# Altium PCB Artemis_Plus.PcbDoc (part 1 of 2)
Units mm, origin at the board's own origin, x right, y up, seen from the top; angles counter-clockwise.
Board outline 15.5 x 10.5 mm, 4 copper layers (L1(Top), L2, L3, L4(Bot)), stack 0.828 mm thick; 85 components, 68 nets, 213 pads, 150 vias.
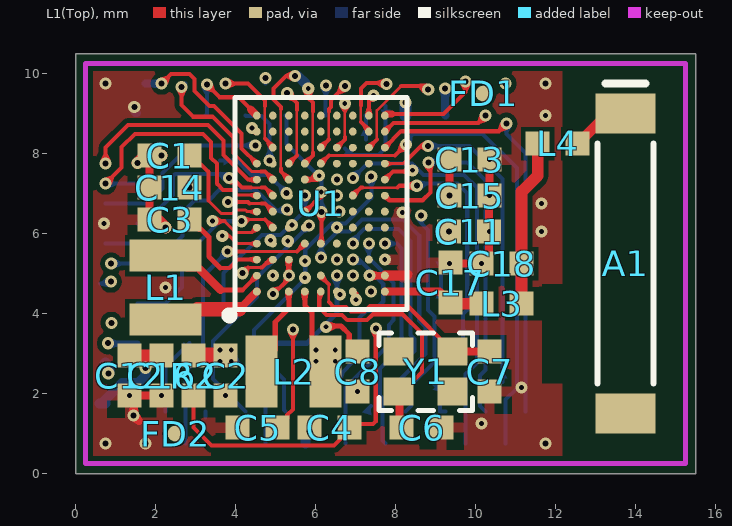
[diagram p0: L1(Top) view]
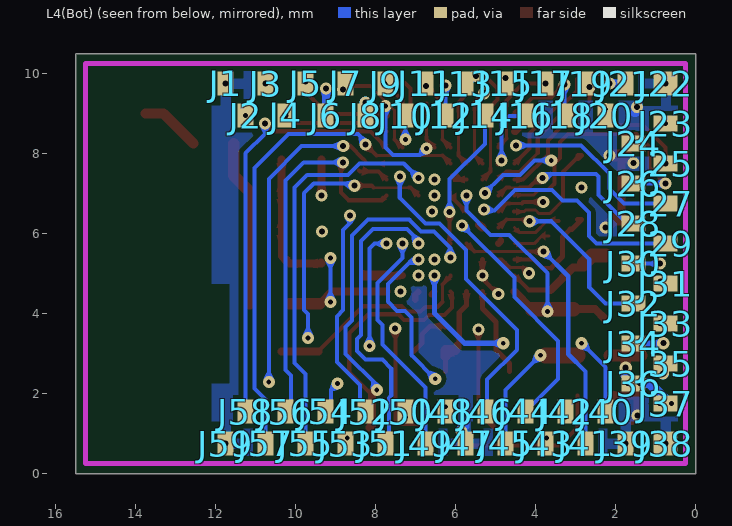
[diagram p1: L4(Bot) view, seen from below]
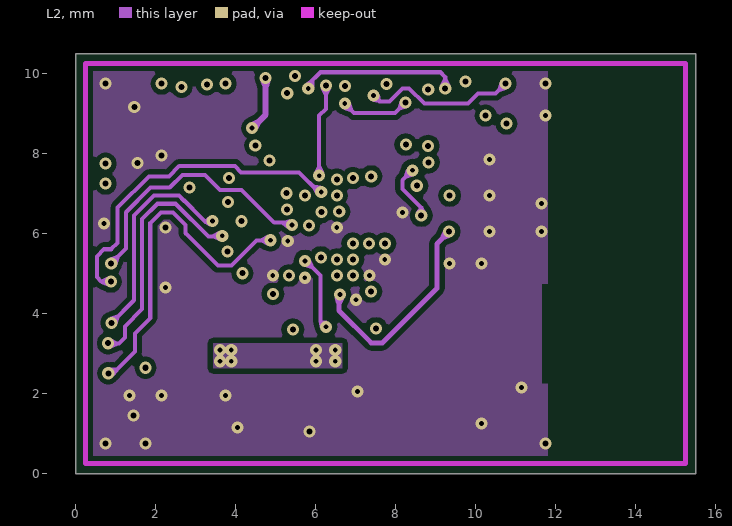
[diagram p2: L2]
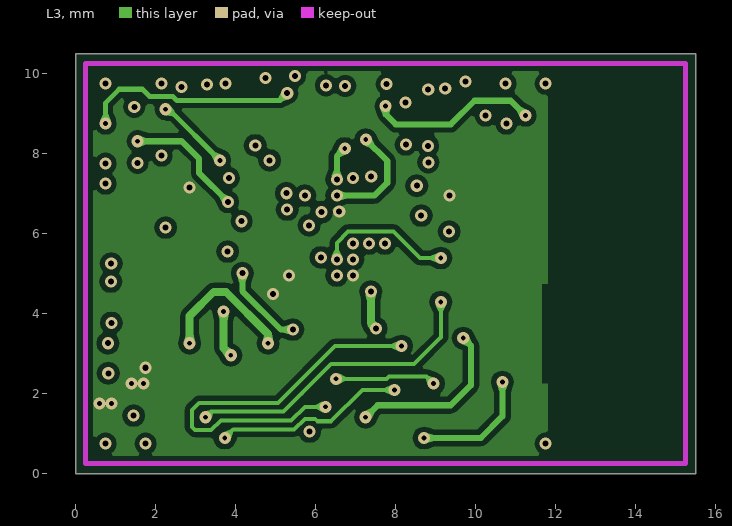
[diagram p3: L3]
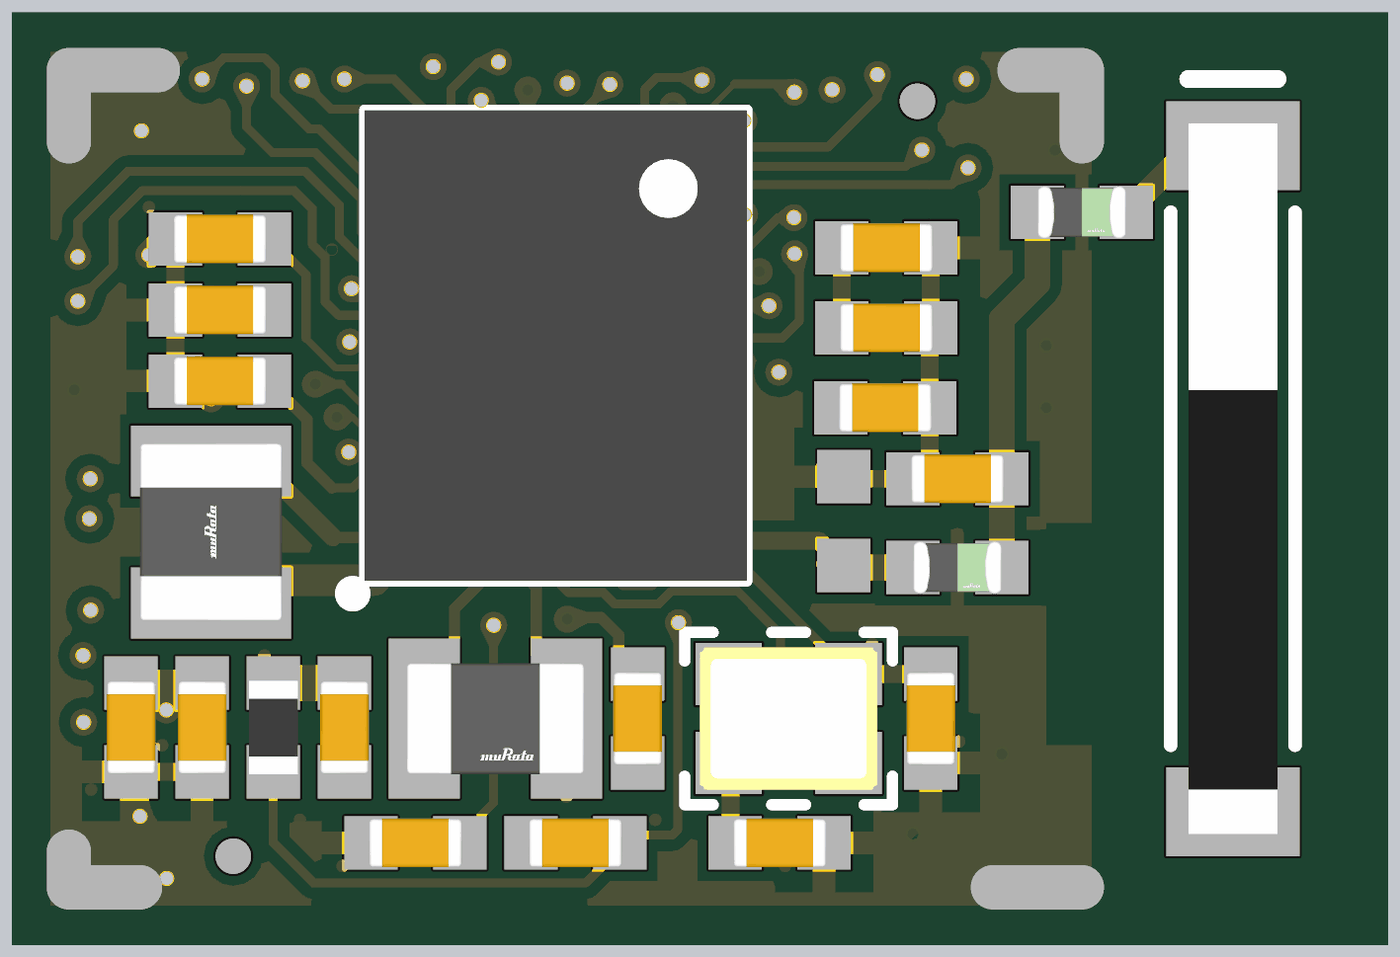
[diagram p4: 3D render of the assembled board from above, using the file's embedded part models]

## Layer stack, top to bottom
Top Solder: solder mask 0.02, Solder Resist, Dk 4.2
L1(Top): signal copper 0.04
Dielectric 1: prepreg 0.074, FR-4, Dk 3.63
L2: signal copper 0.015
Dielectric3: core 0.57, FR-4, Dk 4.24
L3: signal copper 0.015
Dielectric2: dielectric 0.074, FR-4, Dk 3.63
L4(Bot): signal copper 0.04
Bottom Solder: solder mask 0.02, Solder Resist, Dk 4.2

## Board outline
0,10.5 15.5,10.5 15.5,0 0,0

## Design rules (kind name [scope] priority, off if disabled: settings)
BoardOutlineClearance mdCopperDimension [All] p1: gap=0.375 ignorepadtopadclearanceinfootprint=FALSE
Clearance Clearance_for_PolygonClass_Isolate_5 [InPolygonClass('Isolate_5') vs IsArc Or IsTrack Or IsPad Or IsVia Or IsFill Or IsRegion Or IsText] p1: gap=0.127 ignorepadtopadclearanceinfootprint=FALSE
Clearance Clearance_UnderBGA [InNetClass('Under_BGA_Signals') vs OnLayer('L1(Top)')] p2: gap=0.076 ignorepadtopadclearanceinfootprint=FALSE except(0: SMDPad-Via; 0.069: Arc-Arc Arc-Track Arc-SMDPad Track-Track Track-SMDPad SMDPad-SMDPad) // rules for under the BGA
Clearance [All] p3: gap=0.076 ignorepadtopadclearanceinfootprint=FALSE except(0: SMDPad-Via)
HoleSize HoleSize_For_NetClass_3.3V [InNetClass('3.3V')] p1: absolutevalues=TRUE maxlimit=0 minlimit=0 maxpercent=80.000 minpercent=20.000
HoleSize HoleSize_For_NetClass_power [InNetClass('power')] p2: absolutevalues=TRUE maxlimit=0 minlimit=0 maxpercent=80.000 minpercent=20.000
HoleSize [All] p3: absolutevalues=TRUE maxlimit=2540 minlimit=0.12 maxpercent=80.000 minpercent=20.000
HoleToHoleClearance mdDrill [All] p1: gap=0.102 allowstackedmicrovias=TRUE
MinimumSolderMaskSliver [All] p1 off: minsoldermaskwidth=0.254
PasteMaskExpansion Expansion_SMDPaste_OFF [InPadClass('SMDPaste_OFF')] p1: expansion=0
PasteMaskExpansion mlMinCreamFrame [All] p2: expansion=0
PolygonConnect PolygonConnect_For_PolygonThermal_ON_Width40000_Gap100000 [InPolygonClass('PolygonThermal_ON_Width40000_Gap100000') vs Not IsVia] p1: connectstyle=Relief reliefconductorwidth=0.254 reliefentries=4 polygonreliefangle="90 Angle" airgapwidth=0.254
PolygonConnect PolygonConnect_For_PolygonThermal_ON_Width59100_Gap100000 [InPolygonClass('PolygonThermal_ON_Width59100_Gap100000') vs Not IsVia] p2: connectstyle=Relief reliefconductorwidth=0.15 reliefentries=4 polygonreliefangle="90 Angle" airgapwidth=0.254
PolygonConnect ThermalVias [IsVia] p3: connectstyle=Direct reliefconductorwidth=0.254 reliefentries=4 polygonreliefangle="90 Angle" airgapwidth=0.254
PolygonConnect [All] p4: connectstyle=Relief reliefconductorwidth=0.254 reliefentries=4 polygonreliefangle="90 Angle" airgapwidth=0.254
RoutingVias [All] p1: holewidth=0.15 width=0.303 viastyle="Through Hole" minholewidth=0.15 minwidth=0.303 maxholewidth=2.54 maxwidth=2.54
SilkToSolderMaskClearance [IsPad] p1: minsilkscreentomaskgap=0.051 clearancetoexposedcopper=TRUE
SolderMaskExpansion "Apollo3 Plus SM expansion" [InComponent('U1')] p1: expansion=0.038 istentingtop=FALSE
SolderMaskExpansion "Via Tenting" [IsVia] p2: expansion=0.025 istentingtop=TRUE
SolderMaskExpansion "Module Pads mask expansion" [InPadClass('SMDSolder_OFF')] p3: expansion=0 istentingtop=FALSE
SolderMaskExpansion [All] p4: expansion=0.025 istentingtop=FALSE
UnRoutedNet [All] p1: checkbadconnections=TRUE
Width "Width_Under BGA_Signals" [InNetClass('Under_BGA_Signals')] p1: maxlimit=0.5 minlimit=0.069 preferedwidth=0.102 midlayer1_minwidth=0.102 midlayer2_minwidth=0.102 bottomlayer_minwidth=0.102 minimp=50.000000 maximp=50.000000 favimp=50.000000
Width Width_For_NetClass_3.3V [InNetClass('3.3V')] p2: maxlimit=1.016 minlimit=0.254 preferedwidth=0.508
Width Width_For_NetClass_power [InNetClass('power')] p3: maxlimit=0.254 minlimit=0.178 preferedwidth=0.178
Width [All] p4: maxlimit=0.5 minlimit=0.076 preferedwidth=0.102 midlayer1_minwidth=0.102 midlayer2_minwidth=0.102 bottomlayer_minwidth=0.102 minimp=50.000000 maximp=50.000000 favimp=50.000000
24 further rules are at their usual default settings.

## Classes and differential pairs
net class Under_BGA_Signals: BOOTLOAD D7 D8 D9 D10 NetC5_1 NetC7_2 R\S\T\ TXO-0 ~AD11 ~AD13 ~AD32 ~D6 ~D18 ~D22 ~D27 ~D37
polygon class PolygonThermal_ON_Width40000_Gap100000: Polygon_1_Net_GND Polygon_1_Net_VDD Polygon_2_Net_GND Polygon_3_Net_GND
polygon class PolygonThermal_ON_Width59100_Gap100000: Polygon_1_Net_VDDBH
polygon class Isolate_5: Polygon_1_Net_GND Polygon_1_Net_VDD Polygon_2_Net_GND Polygon_3_Net_GND
pad class SMDSolder_OFF: U1-A1 U1-A2 U1-A3 U1-A4 U1-A5 U1-A6 U1-A7 U1-A8 U1-A9 U1-A10 U1-A11 U1-A12 U1-B1 U1-B2 U1-B3 U1-B4 U1-B5 U1-B6 U1-B7 U1-B8 U1-B9 U1-B10 U1-B11 U1-B12 U1-C1 U1-C2 U1-C3 U1-C4 U1-C5 U1-C6 U1-C7 U1-C8 U1-C9 U1-C10 U1-C11 U1-C12 U1-D1 U1-D2 U1-D3 U1-D4 U1-D5 U1-D6 U1-D7 U1-D8 U1-D9 U1-D10 U1-D11 U1-D12 U1-E1 U1-E2 U1-E3 U1-E4 U1-E9 U1-E10 U1-E11 U1-E12 U1-F1 U1-F2 U1-F3 U1-F4 U1-F5 U1-F6 U1-F7 U1-F8 U1-F9 U1-F10 U1-F11 U1-F12 U1-G1 U1-G2 U1-G3 U1-G4 U1-G5 U1-G6 U1-G7 U1-G8 U1-G9 U1-G10 U1-G11 U1-G12 U1-H1 U1-H2 U1-H3 U1-H4 U1-H5 U1-H6 U1-H7 U1-H8 U1-H9 U1-H10 U1-H11 U1-H12 U1-J1 U1-J2 U1-J3 U1-J4 U1-J5 U1-J6 U1-J7 U1-J8 U1-J9 U1-J10 U1-J11 U1-J12

## Components (designator, comment, footprint, x,y, rotation, side; value= is the part's Value field where it differs from the comment)
A1 "RGFRA8010110A2T" RGFRA8010110A2T 13.75,5.25 r270 top
C1 "0.47uF" 0402-TIGHT-C 2.35,7.95 r180 top value=470nF
C2 "4.7uF" 0402-TIGHT-C 3.75,2.45 r270 top
C3 "2.2uF" 0402-TIGHT-C 2.35,6.35 r180 top
C4 "1.0uF" 0402-TIGHT-C 6.35,1.15 r180 top value=1uF
C5 "2.2uF" 0402-TIGHT-C 4.55,1.15 r180 top
C6 "6pF" 0402-TIGHT-C 8.65,1.15 r180 top
C7 "6pF" 0402-TIGHT-C 10.35,2.55 r90 top
C8 "2.2uF" 0402-TIGHT-C 7.05,2.55 r270 top
C11 "47nF" 0402-TIGHT-C 9.838,6.049 r0 top
C12 "1.0uF" 0402-TIGHT-C 1.35,2.45 r270 top value=1uF
C13 "1.0uF" 0402-TIGHT-C 9.85,7.85 r0 top value=1uF
C14 "1.0uF" 0402-TIGHT-C 2.35,7.15 r180 top value=1uF
C15 "1.0uF" 0402-TIGHT-C 9.85,6.95 r0 top value=1uF
C16 "2.2uF" 0402-TIGHT-C 2.15,2.45 r270 top
C17 "DNP" 0402-TIGHT 9.371,4.773 r90 top
C18 "0.5pF" 0402-TIGHT-C 10.65,5.25 r180 top
FD1 "FIDUCIAL0.4MM" FIDUCIAL-0.4MM#1 11.49,10.64 r0 top
FD2 "FIDUCIAL0.4MM" FIDUCIAL-0.4MM#2 2.5,1 r0 top
J1 "PAD.4X.6" MODULE_PAD 11.75,9.75 r270 bottom
J2 "PAD.4X.6" MODULE_PAD 11.25,8.95 r270 bottom
J3 "PAD.4X.6" MODULE_PAD 10.75,9.75 r90 bottom
J4 "PAD.4X.6" MODULE_PAD 10.25,8.95 r270 bottom
J5 "PAD.4X.6" MODULE_PAD 9.75,9.75 r270 bottom
J6 "PAD.4X.6" MODULE_PAD 9.25,8.95 r270 bottom
J7 "PAD.4X.6" MODULE_PAD 8.75,9.75 r270 bottom
J8 "PAD.4X.6" MODULE_PAD 8.25,8.95 r270 bottom
J9 "PAD.4X.6" MODULE_PAD 7.75,9.75 r90 bottom
J10 "PAD.4X.6" MODULE_PAD 7.25,8.95 r90 bottom
J11 "PAD.4X.6" MODULE_PAD 6.75,9.75 r270 bottom
J12 "PAD.4X.6" MODULE_PAD 6.25,8.95 r270 bottom
J13 "PAD.4X.6" MODULE_PAD 5.75,9.75 r270 bottom
J14 "PAD.4X.6" MODULE_PAD 5.25,8.95 r90 bottom
J15 "PAD.4X.6" MODULE_PAD 4.75,9.75 r270 bottom
J16 "PAD.4X.6" MODULE_PAD 4.25,8.95 r90 bottom
J17 "PAD.4X.6" MODULE_PAD 3.75,9.75 r270 bottom
J18 "PAD.4X.6" MODULE_PAD 3.25,8.95 r90 bottom
J19 "PAD.4X.6" MODULE_PAD 2.75,9.75 r90 bottom
J20 "PAD.4X.6" MODULE_PAD 2.25,8.95 r90 bottom
J21 "PAD.4X.6" MODULE_PAD 1.75,9.75 r90 bottom
J22 "" MODULE_MINI_PAD 0.75,9.75 r90 bottom
J23 "PAD.4X.6" MODULE_PAD 0.75,8.75 r0 bottom
J24 "PAD.4X.6" MODULE_PAD 1.55,8.25 r180 bottom
J25 "PAD.4X.6" MODULE_PAD 0.75,7.75 r180 bottom
J26 "PAD.4X.6" MODULE_PAD 1.55,7.25 r0 bottom
J27 "PAD.4X.6" MODULE_PAD 0.75,6.75 r180 bottom
J28 "PAD.4X.6" MODULE_PAD 1.55,6.25 r0 bottom
J29 "PAD.4X.6" MODULE_PAD 0.75,5.75 r180 bottom
J30 "PAD.4X.6" MODULE_PAD 1.55,5.25 r0 bottom
J31 "PAD.4X.6" MODULE_PAD 0.75,4.75 r0 bottom
J32 "PAD.4X.6" MODULE_PAD 1.55,4.25 r180 bottom
J33 "PAD.4X.6" MODULE_PAD 0.75,3.75 r0 bottom
J34 "PAD.4X.6" MODULE_PAD 1.55,3.25 r180 bottom
J35 "PAD.4X.6" MODULE_PAD 0.75,2.75 r180 bottom
J36 "PAD.4X.6" MODULE_PAD 1.55,2.25 r0 bottom
J37 "PAD.4X.6" MODULE_PAD 0.75,1.75 r180 bottom
J38 "PAD.6X.6" MODULE_MINI_PAD 0.75,0.75 r180 bottom
J39 "PAD.4X.6" MODULE_PAD 1.75,0.75 r90 bottom
J40 "PAD.4X.6" MODULE_PAD 2.25,1.55 r270 bottom
J41 "PAD.4X.6" MODULE_PAD 2.75,0.75 r270 bottom
J42 "PAD.4X.6" MODULE_PAD 3.25,1.55 r270 bottom
J43 "PAD.4X.6" MODULE_PAD 3.75,0.75 r270 bottom
J44 "PAD.4X.6" MODULE_PAD 4.25,1.55 r90 bottom
J45 "PAD.4X.6" MODULE_PAD 4.75,0.75 r270 bottom
J46 "PAD.4X.6" MODULE_PAD 5.25,1.55 r270 bottom
J47 "PAD.4X.6" MODULE_PAD 5.75,0.75 r270 bottom
J48 "PAD.4X.6" MODULE_PAD 6.25,1.55 r270 bottom
J49 "PAD.4X.6" MODULE_PAD 6.75,0.75 r270 bottom
J50 "PAD.4X.6" MODULE_PAD 7.25,1.55 r90 bottom
J51 "PAD.4X.6" MODULE_PAD 7.75,0.75 r270 bottom
J52 "PAD.4X.6" MODULE_PAD 8.25,1.55 r90 bottom
J53 "PAD.4X.6" MODULE_PAD 8.75,0.75 r90 bottom
J54 "PAD.4X.6" MODULE_PAD 9.25,1.55 r270 bottom
J55 "PAD.4X.6" MODULE_PAD 9.75,0.75 r90 bottom
J56 "PAD.4X.6" MODULE_PAD 10.25,1.55 r270 bottom
J57 "PAD.4X.6" MODULE_PAD 10.75,0.75 r270 bottom
J58 "PAD.4X.6" MODULE_PAD 11.25,1.55 r270 bottom
J59 "PAD.4X.6" MODULE_PAD 11.75,0.75 r270 bottom
L1 "2.2μH" DFE201610E-2R2MP2 2.25,4.65 r90 top
L2 "1.0uH" LQM21PN1R0MEHD 5.45,2.55 r0 top value=1uH
L3 "2.7nH 900mA 70 mOhm" 0402-TIGHT-L 10.65,4.25 r0 top value=2.7nH
L4 "2nH 900mA 120mOhm" 0402-TIGHT-L 12.05,8.25 r0 top value=2nH
R2 "0" 0402-TIGHT-R 2.95,2.45 r270 top value=0R
U1 "AMBIQ-APOLLO3-BLUE-PLUS" "BGA-104-5.3X4.3MM - Sprite-mixed-0.2-0.19 - 3DModel" 6.13,6.75 r90 top
Y1 "32MHz" ECS-320-6-37B2-CKM-TR 8.75,2.55 r180 top

## Footprints (in the part's own frame and the unit in brackets; to place one, negate y for a bottom-side part, rotate by r counter-clockwise, add the part's x,y. Pads: shape width x height; smd on the part's side, far side on the other; paste and mask are expansions set on the pad)
0402-TIGHT [mm] "0402-TIGHT"
  rect 0.6x0.6 smd: 1(-0.5,0) 2(0.5,0)
0402-TIGHT-C [mm] "0402-TIGHT Capacitor"
  rect 0.6x0.6 smd: 1(-0.5,0) 2(0.5,0)
  body extent -0.53,-0.28 0.53,0.28, height 0.6
0402-TIGHT-L [mm] "0402-TIGHT Inductor"
  rect 0.6x0.6 smd: 1(-0.5,0) 2(0.5,0)
  body extent -1.04,-0.59 1.04,0.59, height 0.25
0402-TIGHT-R [mm] "0402-TIGHT-Resistor model"
  rect 0.6x0.6 smd: 1(-0.5,0) 2(0.5,0)
  body extent -0.53,-0.28 0.53,0.28, height 0.4
"BGA-104-5.3X4.3MM - Sprite-mixed-0.2-0.19 - 3DModel" [mm] "BGA-104-5.3X4.3MM"
  rrect100% 0.2x0.2 smd mask+0.038: A1(-2.2,1.6) A10(1.4,1.6) B1(-2.2,1.2) B2(-1.8,1.2) B5(-0.6,1.2) B6(-0.2,1.2) B7(0.2,1.2) B8(0.6,1.2) C1(-2.2,0.8) C2(-1.8,0.8) C5(-0.6,0.8) C6(-0.2,0.8) C7(0.2,0.8) C8(0.6,0.8) D1(-2.2,0.4) D2(-1.8,0.4) D3(-1.4,0.4) D4(-1,0.4) D5(-0.6,0.4) D6(-0.2,0.4) D7(0.2,0.4) D8(0.6,0.4) D9(1,0.4) E2(-1.8,0) E3(-1.4,0) E4(-1,0) E9(1,0) F2(-1.8,-0.4) F3(-1.4,-0.4) F4(-1,-0.4) F5(-0.6,-0.4) F6(-0.2,-0.4) F7(0.2,-0.4) F8(0.6,-0.4) G1(-2.2,-0.8) G2(-1.8,-0.8) G3(-1.4,-0.8) G4(-1,-0.8) G5(-0.6,-0.8) G6(-0.2,-0.8) G7(0.2,-0.8) G8(0.6,-0.8) H1(-2.2,-1.2) H2(-1.8,-1.2) H3(-1.4,-1.2) H4(-1,-1.2) H5(-0.6,-1.2) H6(-0.2,-1.2) J1(-2.2,-1.6) J2(-1.8,-1.6) J3(-1.4,-1.6) J4(-1,-1.6) J5(-0.6,-1.6) J6(-0.2,-1.6)
  rrect100% 0.19x0.2 smd mask+0.038: A2(-1.8,1.6) A3(-1.4,1.6) A4(-1,1.6) A5(-0.6,1.6) A6(-0.2,1.6) A7(0.2,1.6) A8(0.6,1.6) A9(1,1.6) B3(-1.4,1.2) B4(-1,1.2) C3(-1.4,0.8) C4(-1,0.8) F9(1,-0.4) F10(1.4,-0.4) G9(1,-0.8) G10(1.4,-0.8) H7(0.2,-1.2) H8(0.6,-1.2) H9(1,-1.2) H10(1.4,-1.2) J7(0.2,-1.6) J8(0.6,-1.6) J9(1,-1.6) J10(1.4,-1.6)
  rrect100% 0.2x0.19 smd mask+0.038: A11(1.8,1.6) A12(2.2,1.6) B9(1,1.2) B10(1.4,1.2) B11(1.8,1.2) B12(2.2,1.2) C9(1,0.8) C10(1.4,0.8) C11(1.8,0.8) C12(2.2,0.8) D10(1.4,0.4) D11(1.8,0.4) D12(2.2,0.4) E1(-2.2,0) E10(1.4,0) E11(1.8,0) E12(2.2,0) F1(-2.2,-0.4) F11(1.8,-0.4) F12(2.2,-0.4) G11(1.8,-0.8) G12(2.2,-0.8) H11(1.8,-1.2) H12(2.2,-1.2) J11(1.8,-1.6) J12(2.2,-1.6)
  silkscreen extent -2.89,-2.15 2.65,2.39, body extent -2.65,-2.15 2.65,2.15, height 0.8
DFE201610E-2R2MP2 [mil] "DFE201610E-2R2MP2 footprint"
  rect 31.5x70.87 smd: 1(-31.5,0) 2(31.5,0)
  body extent -85,-57 85,57, height 10
ECS-320-6-37B2-CKM-TR [mm] "ECS-320-6-37B2-CKM-TR Footprint"
  rect 0.75x0.7 smd: 1(-0.675,-0.5) 2(0.675,-0.5) 3(0.675,0.5) 4(-0.675,0.5)
  silkscreen extent -1.17,-0.97 1.17,0.97, body extent -1,-0.8 1,0.8, height 0.5
FIDUCIAL-0.4MM#1 [mm] "FIDUCIAL-0.4MM"
  rrect100% 0.4x0.4 smd paste+0 mask+0.025: 1(-1.29,-1.14)
FIDUCIAL-0.4MM#2 [mm] "FIDUCIAL-0.4MM"
  rrect100% 0.4x0.4 smd paste+0 mask+0.025: 1(0,0)
LQM21PN1R0MEHD [mil] "0805-WIDE"
  rect 31.5x70.87 smd: 1(-31.5,0) 2(31.5,0)
  body extent -84,-49 84,49, height 10
MODULE_MINI_PAD [mm] "MODULE_MINI_PAD"
  rect 0.6x0.6 smd paste-0.6 mask+0.025: 1(0,0)
MODULE_PAD [mm] "MODULE_PAD"
  rect 0.6x0.4 smd paste-0.4 mask+0.025: 1(0,0)
RGFRA8010110A2T [mm] "RGFRA8010110A2T Footprint with 3D Model"
  rect 1x1.5 smd: FEED(-3.75,0) NC(3.75,0)
  silkscreen extent -4.5,-0.7 3,0.7, body extent -4,-0.5 4,0.5, height 1.11

## Part data
A1: "Chip Antenna, 2.45Ghz, Smt Rohs Compliant: Yes", Manufacturer="Walsin Technologies", Supplier Part Number 1=1292-RGFRA8010110A2TCT-ND, Category="RF Antennas", Manufacturer Part Number=RGFRA8010110A2T, Pricing 1="1=0.36, 10=0.293, 25=0.2684, 100=0.1997, 250=0.181, 500=0.1498, 1000=0.11235 (USD)", RoHS=No, Stock 1=5842, Supplier 1=Digi-Key
C1: library part CC0402KRX7R6BB474, "Multilayer Ceramic Capacitor, 0.47 uF, 50 V, ± 2%, C0G (NP0), 0402 [1005 Metric]", Case/Package=0402, Dielectric=X7R, Manufacturer=Yageo, Max Operating Temperature=125°C, Min Operating Temperature=-55°C, Supplier Part Number 1=13-CC0402KRX7R6BB474CT-ND, Temperature Coefficient=30ppm/°C, Tolerance=10%, Voltage Rating=10V, Category="Ceramic Capacitors", ComponentLink1Description=http://www.yageo.com/documents/recent/UPY-GPHC_X7R_6.3V-to-50V_18.pdf?src-supplier=Digi-Key, ComponentLink1URL=http://www.yageo.com/documents/recent/UPY-GPHC_X7R_6.3V-to-50V_18.pdf?src-supplier=Digi-Key, ComponentLink2Description=https://datasheet.octopart.com/CC0402KRX7R6BB474-Yageo-datasheet-151948686.pdf?src-supplier=Farnell, ComponentLink2URL=https://datasheet.octopart.com/CC0402KRX7R6BB474-Yageo-datasheet-151948686.pdf?src-supplier=Farnell, ComponentLink3Description=https://datasheet.octopart.com/CC0402KRX7R6BB474-Yageo-datasheet-166511530.pdf?src-supplier=Future+Electronics, ComponentLink3URL=https://datasheet.octopart.com/CC0402KRX7R6BB474-Yageo-datasheet-166511530.pdf?src-supplier=Future+Electronics, Halogen Free="Halogen Free", Height=550um, Lead Free="Lead Free", Length=0.039inch, Manufacturer Part Number=CC0402KRX7R6BB474, Material=4241ConductorMaterial, Mounting Technology="Surface Mount", Packaging="Tape and Reel", Pricing 1="10=0.17, 50=0.1022, 100=0.0864, 500=0.05908, 1000=0.05227, 2500=0.05, 5000=0.04545 (USD)", RoHS=Yes, RoHS Compliant=Yes, Series=CC, Stock 1=3340, Supplier 1=Digi-Key, Thickness=0.022inch, Voltage Rating (DC)=10V, Width=0.02inch
C2: library part CL05A475MP5NRNC, "Multilayer Ceramic Capacitor, 4.7 uF, 10 V, ± 20%, X5R, 0402 [1005 Metric]", Case Code (Imperial)=0402, Case Code (Metric)=1005, Dielectric=X5R, Manufacturer=Samsung, Max Operating Temperature=85°C, Min Operating Temperature=-55°C, Supplier Part Number 1=1276-1482-1-ND, Tolerance=20%, Voltage Rating=10V, Case/Package=0402, Category="Ceramic Capacitors", ComponentLink1Description=https://datasheet.ciiva.com/25786/cl05a475mp5nrnc-25786963.pdf?src-supplier=Digi-Key, ComponentLink1URL=https://datasheet.ciiva.com/25786/cl05a475mp5nrnc-25786963.pdf?src-supplier=Digi-Key, ComponentLink2Description=https://datasheet.ciiva.com/16437/cl05b104kq5nnnc-16437353.pdf?src-supplier=Future+Electronics, ComponentLink2URL=https://datasheet.ciiva.com/16437/cl05b104kq5nnnc-16437353.pdf?src-supplier=Future+Electronics, Height=550um, Lead Free="Lead Free", Manufacturer Part Number=CL05A475MP5NRNC, Material=4241ConductorMaterial, Mounting Technology="Surface Mount", Packaging="Cut Tape", Pricing 1="1=0.1, 10=0.068, 50=0.0368, 100=0.0301, 500=0.0215, 1000=0.01689, 2500=0.01535, 5000=0.01412 (USD)", RoHS=Yes, RoHS Compliant=Yes, Series=CL, Stock 1=3126621, Supplier 1=Digi-Key
C3 C5 C8 C16: library part GRM155R61A225KE01D, "Multilayer Ceramic Capacitor, 2.2 uF, 10 V, ± 10%, X5R, 0402 [1005 Metric]", Manufacturer=Murata, Supplier Part Number 1=490-GRM155R61A225KE01DCT-ND, Category="Ceramic Capacitors", ComponentLink1Description=https://datasheet.octopart.com/GRM155R61A225KE01D-Murata-datasheet-165579666.pdf?src-supplier=TME, ComponentLink1URL=https://datasheet.octopart.com/GRM155R61A225KE01D-Murata-datasheet-165579666.pdf?src-supplier=TME, Manufacturer Part Number=GRM155R61A225KE01D, Pricing 1="1=0.1, 10=0.046, 50=0.0252, 100=0.0205, 500=0.01466, 1000=0.01151, 2500=0.01046, 5000=0.00963 (USD)", RoHS=Yes, Stock 1=9438, Supplier 1=Digi-Key
C4 C12 C13 C14 C15: library part GRM155R70J105KA12J, "Multilayer Ceramic Capacitor, 1 uF, 6.3 V, ± 10%, X7R, 0402 [1005 Metric]", Case Code (Imperial)=0402, Case Code (Metric)=1005, Dielectric=X7R, Manufacturer=Murata, Max Operating Temperature=125°C, Min Operating Temperature=-55°C, Package Quantity=50000, Supplier Part Number 1=490-13339-1-ND, Tolerance=10%, Voltage Rating=6.3V, Case/Package=0402, Category="Ceramic Capacitors", ComponentLink1Description=http://www.mouser.com/ds/2/281/c02e-2905.pdf?src-supplier=Mouser, ComponentLink1URL=http://www.mouser.com/ds/2/281/c02e-2905.pdf?src-supplier=Mouser, ComponentLink2Description=https://datasheet.octopart.com/GRM155R70J105KA12J-Murata-datasheet-32479577.pdf?src-supplier=Future+Electronics, ComponentLink2URL=https://datasheet.octopart.com/GRM155R70J105KA12J-Murata-datasheet-32479577.pdf?src-supplier=Future+Electronics, ComponentLink3Description=https://datasheet.octopart.com/GRM155R70J105KA12J-Murata-datasheet-155345054.pdf?src-supplier=Element14, ComponentLink3URL=https://datasheet.octopart.com/GRM155R70J105KA12J-Murata-datasheet-155345054.pdf?src-supplier=Element14, ComponentLink4Description=http://search.murata.co.jp/Ceramy/image/img/A01X/G101/ENG/GRM155R70J105KA12-01.pdf?src-supplier=Digi-Key, ComponentLink4URL=http://search.murata.co.jp/Ceramy/image/img/A01X/G101/ENG/GRM155R70J105KA12-01.pdf?src-supplier=Digi-Key, ComponentLink5Description=https://datasheet.octopart.com/GRM155R70J105KA12J-Murata-datasheet-165579666.pdf?src-supplier=TME, ComponentLink5URL=https://datasheet.octopart.com/GRM155R70J105KA12J-Murata-datasheet-165579666.pdf?src-supplier=TME, Length=0.039inch, Manufacturer Part Number=GRM155R70J105KA12J, Mounting Technology="Surface Mount", Packaging="Tape and Reel", Pins=2NUMBER, Pricing 1="1=0.1, 10=0.033, 50=0.0178, 100=0.0145, 500=0.01036, 1000=0.00813, 2500=0.00739, 5000=0.0068 (USD)", RoHS=Yes, RoHS Compliant=Yes, Series=GRM, Stock 1=4901077, Supplier 1=Digi-Key, Termination=SMD/SMT, Thickness=0.022inch, Voltage Rating (DC)=6.3V, Weight=0.000212oz, Width=0.02inch
C6 C7: library part 0402N6R0D500CT, "0402 6 pF 50 V ±0.5 pF Tolerance C0G/NP0 SMT Multilayer Ceramic Capacitor", Case Code (Imperial)=0402, Case Code (Metric)=1005, Dielectric=C0G, Manufacturer="Walsin Technologies", Max Operating Temperature=125°C, Min Operating Temperature=-55°C, Supplier Part Number 1=1292-1348-1-ND, Voltage Rating=50V, Case/Package=0402, Category="Ceramic Capacitors", ComponentLink1Description=http://www.farnell.com/datasheets/2340522.pdf?src-supplier=Farnell, ComponentLink1URL=http://www.farnell.com/datasheets/2340522.pdf?src-supplier=Farnell, ComponentLink2Description=http://www.farnell.com/datasheets/1958513.pdf?src-supplier=Farnell, ComponentLink2URL=http://www.farnell.com/datasheets/1958513.pdf?src-supplier=Farnell, ComponentLink3Description=http://www.passivecomponent.com/wp-content/uploads/2018/10/MLCC.pdf?src-supplier=Digi-Key, ComponentLink3URL=http://www.passivecomponent.com/wp-content/uploads/2018/10/MLCC.pdf?src-supplier=Digi-Key, ComponentLink4Description=https://datasheet.octopart.com/0402N6R0D500CT-Walsin-Technologies-datasheet-85392065.pdf?src-supplier=Element14, ComponentLink4URL=https://datasheet.octopart.com/0402N6R0D500CT-Walsin-Technologies-datasheet-85392065.pdf?src-supplier=Element14, ComponentLink5Description=https://datasheet.octopart.com/0402N6R0D500CT-Walsin-Technologies-datasheet-136037192.pdf?src-supplier=TECHDesign, ComponentLink5URL=https://datasheet.octopart.com/0402N6R0D500CT-Walsin-Technologies-datasheet-136037192.pdf?src-supplier=TECHDesign, Lead Free=5697LeadFree, Manufacturer Part Number=0402N6R0D500CT, Packaging="Tape and Reel", Pricing 1="1=0.1, 10=0.024, 50=0.0134, 100=0.0109, 500=0.00778, 1000=0.00611, 2500=0.00556, 5000=0.00511 (USD)", Reach SVHC Compliant=Unknown, RoHS=Yes, RoHS Compliant=Yes, Stock 1=55050, Supplier 1=Digi-Key, Voltage Rating (DC)=50V
C11: library part GCM155R71C473KA37D, "CAP CER 0.047UF 16V 10% X7R 0402", Case Code (Imperial)=0402, Case Code (Metric)=1005, Dielectric=X7R, Manufacturer=Murata, Max Operating Temperature=125°C, Min Operating Temperature=-55°C, Package Quantity=1, Ratings=AEC-Q200, Supplier Part Number 1=490-6042-1-ND, Tolerance=10%, Voltage Rating=16V, Case/Package=0402, Category="Ceramic Capacitors", ComponentLink1Description=https://datasheet.ciiva.com/11607/product-11607786.pdf?src-supplier=Avnet, ComponentLink1URL=https://datasheet.ciiva.com/11607/product-11607786.pdf?src-supplier=Avnet, ComponentLink2Description=https://datasheet.ciiva.com/6270/s0717e-6270764.pdf?src-supplier=Digi-Key, ComponentLink2URL=https://datasheet.ciiva.com/6270/s0717e-6270764.pdf?src-supplier=Digi-Key, ComponentLink3Description=https://datasheet.ciiva.com/6270/s0717e-6270765.pdf?src-supplier=Digi-Key, ComponentLink3URL=https://datasheet.ciiva.com/6270/s0717e-6270765.pdf?src-supplier=Digi-Key, ComponentLink4Description=https://datasheet.ciiva.com/6270/s0717e-6270766.pdf?src-supplier=Digi-Key, ComponentLink4URL=https://datasheet.ciiva.com/6270/s0717e-6270766.pdf?src-supplier=Digi-Key, Construction=Flat, Depth=0.5mm, Height=0.5mm, Length=1mm, Manufacturer Part Number=GCM155R71C473KA37D, Mounting Technology="Surface Mount", Packaging="Tape and Reel", Pricing 1="1=0.1, 10=0.048, 50=0.0262, 100=0.0214, 500=0.01528, 1000=0.01201, 2500=0.01092, 5000=0.01005 (USD)", Radiation Hardening=No, RoHS=Yes, RoHS Compliant=Yes, Series=GCM, Stock 1=635782, Supplier 1=Digi-Key, Termination=SMD/SMT, Thickness=0.022inch, Voltage Rating (DC)=16V, Width=0.02inch
C17: library part DNP-CAP-0402-TIGHT
C18: library part GJM1555C1HR50CB01D, "Multilayer Ceramic Capacitor, 0.5 pF, 50 V, ± 0.25pF, C0G (NP0), 0402 [1005 Metric]", Case Code (Imperial)=0402, Case Code (Metric)=1005, Dielectric=C0G, Manufacturer=Murata, Max Operating Temperature=125°C, Min Operating Temperature=-55°C, Package Quantity=1, Supplier Part Number 1=490-3081-1-ND, Voltage Rating=50V, Case/Package=0402, Category="Ceramic Capacitors", ComponentLink1Description=https://datasheet.ciiva.com/129/chip20monolithic20cer20caps20c02e-13-129648.pdf?src-supplier=Digi-Key, ComponentLink1URL=https://datasheet.ciiva.com/129/chip20monolithic20cer20caps20c02e-13-129648.pdf?src-supplier=Digi-Key, ComponentLink2Description=https://datasheet.ciiva.com/16440/gjm1555c1hr50cb01d-16440467.pdf?src-supplier=Future+Electronics, ComponentLink2URL=https://datasheet.ciiva.com/16440/gjm1555c1hr50cb01d-16440467.pdf?src-supplier=Future+Electronics, ComponentLink3Description=https://datasheet.ciiva.com/11617/c02e-11617174.pdf?src-supplier=Avnet, ComponentLink3URL=https://datasheet.ciiva.com/11617/c02e-11617174.pdf?src-supplier=Avnet, ComponentLink4Description=https://datasheet.ciiva.com/29541/partnumbering-e-01-29541100.pdf?src-supplier=Digi-Key, ComponentLink4URL=https://datasheet.ciiva.com/29541/partnumbering-e-01-29541100.pdf?src-supplier=Digi-Key, ComponentLink5Description=https://datasheet.ciiva.com/29541/partnumbering-e-01-29541101.pdf?src-supplier=Digi-Key, ComponentLink5URL=https://datasheet.ciiva.com/29541/partnumbering-e-01-29541101.pdf?src-supplier=Digi-Key, Construction=Flat, Depth=0.5mm, Height=0.5mm, Lead Free="Lead Free", Length=0.039inch, Manufacturer Part Number=GJM1555C1HR50CB01D, Mounting Technology="Surface Mount", Packaging="Tape and Reel", Pricing 1="1=0.1, 10=0.044, 50=0.024, 100=0.0196, 500=0.01402, 1000=0.01101, 2500=0.01001, 5000=0.00921 (USD)", Radiation Hardening=No, RoHS=Yes, RoHS Compliant=Yes, Series=GJM, Stock 1=21170, Supplier 1=Digi-Key, Termination=SMD/SMT, Thickness=0.022inch, Voltage Rating (DC)=50V, Width=0.02inch
FD1 FD2: "Fiducial Alignment Points    Point-of-reference for pick-and-place machines and other optical instruments.", DeviceName=0.4MM, DeviceSetName=FIDUCIAL, GateName_1=G$1, LibraryName=FIDUCIAL, SymbolName_1=FIDUCIAL
J22: library part PAD.6X.6, DeviceName=.6X.6, DeviceSetName=PAD, GateName_1=G$1, SymbolName_1=PAD
L1: library part DFE201610E-2R2M=P2, "Inductor Power Shielded Wirewound 2.2uH 20% 1MHz Metal 1.7A 0.14Ohm DCR 0806 T/R", Case/Package=Metal, Manufacturer=Murata, Manufacturer Part Number=DFE201610E-2R2M=P2, Supplier Part Number 1=490-17728-1-ND, Category="Fixed Inductors", ComponentLink1Description=http://www.farnell.com/datasheets/2339713.pdf?src-supplier=Farnell, ComponentLink1URL=http://www.farnell.com/datasheets/2339713.pdf?src-supplier=Farnell, ComponentLink2Description=https://datasheet.octopart.com/DFE201610E-2R2M%3DP2-Murata-datasheet-90967093.pdf?src-supplier=Element14, ComponentLink2URL=https://datasheet.octopart.com/DFE201610E-2R2M%3DP2-Murata-datasheet-90967093.pdf?src-supplier=Element14, ComponentLink3Description=http://search.murata.co.jp/Ceramy/image/img/P02/J(E)TE243A-0001_DFE201610E_reference.pdf?src-supplier=Digi-Key, ComponentLink3URL=http://search.murata.co.jp/Ceramy/image/img/P02/J(E)TE243A-0001_DFE201610E_reference.pdf?src-supplier=Digi-Key, Pricing 1="1=0.32, 10=0.276, 25=0.2364, 50=0.2166, 100=0.197, 250=0.18512, 500=0.16544, 1000=0.13393 (USD)", RoHS=Yes, RoHS Compliant=Yes, Stock 1=38138, Supplier 1=Digi-Key
L2: library part LQM21PN1R0MEHD, "Inductor Power Chip Shielded Multi-Layer 1uH 20% 1MHz Ferrite 1.6A 0.107Ohm DCR 0805 T/R", Case Code (Imperial)=0805, Case Code (Metric)=2012, Current Rating=1.6A, DC Resistance (DCR)=107mR, Manufacturer=Murata, Max Operating Temperature=85°C, Min Operating Temperature=-40°C, Saturation Current=1A, Self Resonant Frequency=50MHz, Supplier Part Number 1=490-15984-1-ND, Test Frequency=1MHz, Tolerance=20%, Case/Package=0805, Category="Fixed Inductors", ComponentLink1Description=https://media.digikey.com/pdf/Data%20Sheets/Murata%20PDFs/LQx_Land-Patterns.pdf?src-supplier=Digi-Key, ComponentLink1URL=https://media.digikey.com/pdf/Data%20Sheets/Murata%20PDFs/LQx_Land-Patterns.pdf?src-supplier=Digi-Key, ComponentLink2Description=http://search.murata.co.jp/Ceramy/image/img/P02/JELF243B-0070.pdf?src-supplier=Digi-Key, ComponentLink2URL=http://search.murata.co.jp/Ceramy/image/img/P02/JELF243B-0070.pdf?src-supplier=Digi-Key, Core Material=Ferrite, Manufacturer Part Number=LQM21PN1R0MEHD, Mounting Technology="Surface Mount", Packaging="Cut Tape", Pricing 1="1=0.22, 10=0.194, 25=0.1668, 50=0.1528, 100=0.1389, 250=0.13056, 500=0.11666, 1000=0.09444 (USD)", RoHS=Yes, RoHS Compliant=Yes, Series=LQM21, Shielding=Shielded, Stock 1=16537, Supplier 1=Digi-Key
L3: library part LQG15WZ2N7S02D, "IND 2.7NH 900MA 70 MOHM", Case Code (Imperial)=0402, Case Code (Metric)=1005, Current Rating=900mA, DC Resistance (DCR)=70mR, Manufacturer=Murata, Max Operating Temperature=125°C, Min Operating Temperature=-55°C, Ratings=AEC-Q200, Self Resonant Frequency=6.5GHz, Supplier Part Number 1=490-15274-1-ND, Test Frequency=100MHz, Case/Package=0402, Category="Fixed Inductors", ComponentLink1Description=http://search.murata.co.jp/Ceramy/image/img/P02/JELF243B-9117.pdf?src-supplier=Digi-Key, ComponentLink1URL=http://search.murata.co.jp/Ceramy/image/img/P02/JELF243B-9117.pdf?src-supplier=Digi-Key, Core Material=Air, Manufacturer Part Number=LQG15WZ2N7S02D, Mounting Technology="Surface Mount", Packaging="Cut Tape", Pricing 1="1=0.12, 10=0.105, 25=0.0892, 50=0.0788, 100=0.0722, 250=0.06564, 500=0.06172, 1000=0.04727, 2500=0.04464 (USD)", RoHS=Yes, RoHS Compliant=Yes, Series=LQG15, Shielding=Unshielded, Stock 1=21001, Supplier 1=Digi-Key
L4: library part LQG15HN2N0S02D, "FIXED IND 2NH 900MA 120 MOHM SMD", Case Code (Imperial)=0402, Case Code (Metric)=1005, Current=300mA, DC Resistance (DCR)=120mR, Inductor Type=MONOLITHIC, Manufacturer=Murata, Max Operating Temperature=125°C, Min Operating Temperature=-55°C, Package Quantity=1, Self Resonant Frequency=6GHz, Supplier Part Number 1=490-6558-1-ND, Test Frequency=100MHz, Case/Package=0402, Category="Fixed Inductors", ComponentLink1Description=https://datasheet.ciiva.com/11799/0900766b8090d3b8-11799042.pdf?src-supplier=Rs, ComponentLink1URL=https://datasheet.ciiva.com/11799/0900766b8090d3b8-11799042.pdf?src-supplier=Rs, ComponentLink2Description=https://datasheet.ciiva.com/4976/o05e-4976477.pdf?src-supplier=Mouser, ComponentLink2URL=https://datasheet.ciiva.com/4976/o05e-4976477.pdf?src-supplier=Mouser, ComponentLink3Description=https://datasheet.ciiva.com/8510/l0075s0083lqg15hn-8510907.pdf?src-supplier=Avnet, ComponentLink3URL=https://datasheet.ciiva.com/8510/l0075s0083lqg15hn-8510907.pdf?src-supplier=Avnet, Core Material=Air, Current Rating=300mA, DC Current=300mA, Depth=0.55mm, Height=0.5mm, Height - Seated (Max)=0.022inch, Length=1mm, Manufacturer Part Number=LQG15HN2N0S02D, Max DC Current=300mA, Military Standard=Not, Mounting Technology="Surface Mount", Packaging="Tape and Reel", Pins=2, Pricing 1="1=0.1, 10=0.047, 25=0.04, 50=0.0354, 100=0.0325, 250=0.02956, 500=0.02776, 1000=0.02127, 2500=0.02009 (USD)", Q Factor=8, Reach SVHC Compliant=No, RoHS=Yes, RoHS Compliant=Yes, Series=LQG15, Shielding=Unshielded, Stock 1=59191, Supplier 1=Digi-Key, Termination=SMD/SMT, Width=0.02inch
R2: library part RMCF0402ZT0R00, "Res Thick Film 0402 0 Ohm Jumper Molded SMD Paper T/R", Case Code (Imperial)=0402, Case Code (Metric)=1005, Current Rating=1A, Manufacturer="Stackpole Electronics", Max Operating Temperature=155°C, Max Power Dissipation=63mW, Min Operating Temperature=-55°C, Supplier Part Number 1=RMCF0402ZT0R00CT-ND, Voltage Rating=50V, Case/Package=0402, Category="Chip SMD Resistors", ComponentLink1Description=https://datasheet.ciiva.com/26835/getdatasheetpartid-409751-26835612.pdf?src-supplier=Verical, ComponentLink1URL=https://datasheet.ciiva.com/26835/getdatasheetpartid-409751-26835612.pdf?src-supplier=Verical, Construction=Rectangular, Contact Plating=Tin,Matte, Depth=0.5mm, Features="Automotive AEC-Q200", Height=0.016inch, Lead Free=5697LeadFree, Length=0.039inch, Manufacturer Part Number=RMCF0402ZT0R00, Military Standard=Not, Mounting Technology="Surface Mount", Number of Terminations=2, Packaging="Tape and Reel", Power Rating=63mW, Pricing 1="1=0.1, 10=0.01, 25=0.0076, 50=0.0056, 100=0.0042, 250=0.0032, 500=0.00254, 1000=0.00187, 5000=0.00134 (USD)", Radiation Hardening=No, RoHS=Yes, RoHS Compliant=Yes, Series=RMCF, Stock 1=6411237, Supplier 1=Digi-Key, Technology="THICK FILM", Width=0.02inch, Working Voltage=50V
U1: library part AMA3B2KK-KBR, "Apollo3 Blue Plus 96 MHz Cortex M4F, 2048 KB Flash, 768 KB RAM, BLE 5, BGA", Manufacturer="Ambiq Micro", Supplier Part Number 1=5128-AMA3B2KK-KBRCT-ND, Category=Uncategorized, Manufacturer Part Number=AMA3B2KK-KBR, Pricing 1="1=6.61, 10=5.972, 25=5.694, 100=4.944, 250=4.72176, 500=4.30512, 1000=3.74962, 2500=3.61075 (USD)", RoHS=No, Stock 1=2496, Supplier 1=Digi-Key
Y1: library part ECS-320-6-37B2-CKM-TR, "Crystal 32 Mhz 6PF SMD", Manufacturer="ECS International", Supplier Part Number 1=50-ECS-320-6-37B2-CKM-TRCT-ND, 1=1, 2=2, Category=Uncategorized, Manufacturer Part Number=ECS-320-6-37B2-CKM-TR, Pricing 1="1=0.4, 10=0.334, 50=0.3006, 100=0.2673, 500=0.25392, 1000=0.21383 (USD)", RoHS=No, Stock 1=16034, Supplier 1=Digi-Key
J1 J2 J3 J4 J5 J6 J7 J8 J9 J10 J11 J12 J13 J14 J15 J16 J17 J18 J19 J20 J21 J23 J24 J25 J26 J27 J28 J29 J30 J31 J32 J33 J34 J35 J36 J37 J39 J40 J41 J42 J43 J44 J45 J46 J47 J48 J49 J50 J51 J52 J53 J54 J55 J56 J57 J58 J59: DeviceName=.4X.6, DeviceSetName=PAD, GateName_1=G$1, LibraryName=Module-Pads, SymbolName_1=PAD
J38: DeviceName=.6X.6, DeviceSetName=PAD, GateName_1=G$1, SymbolName_1=PAD

## Via types
v1: diameter 0.303/0.303/0.303/0.303 (per signal layer), hole 0.15, L1(Top) to L4(Bot), tented both sides, 71 vias
v2: diameter 0.303, hole 0.12, L1(Top) to L2, tented both sides, 44 vias
v3: diameter 0.303/0.303 (per signal layer), hole 0.12, L3 to L4(Bot), tented both sides, 21 vias
v4: diameter 0.303, hole 0.12, L3 to L4(Bot), tented both sides, 8 vias
v5: diameter 0.303/0.303 (per signal layer), hole 0.12, L1(Top) to L2, tented both sides, 3 vias
v6: diameter 0.303, hole 0.15, L1(Top) to L4(Bot), tented both sides, 3 vias

## Nets (pads, with @x,y where several pads share a name; then routed paths per layer and width w, separated by ;. In a path a pad name is that pad's centre, name@x,y a point inside that pad or via, vN(x,y) a via of type N, cw(c..) or ccw(c..) an arc to the next point about the centre after c; other vN are vias at no path point)
AD16: J42.1 U1.F3 | length 12.2
  L3 w0.102: v3(3.25,1.41) 3.39,1.55 5.2,1.55 5.66,2.01 6.39,2.74 8.46,2.74 9.13,3.41 v3(9.13,4.29) ; v1(6.53,5.35) 6.53,5.77 6.81,6.05 7.95,6.05 8.61,5.39 v3(9.13,5.39)
  L4(Bot) w0.102: v3(3.25,1.41) J42.1 ; v3(9.13,4.29) v3(9.13,5.39)
AD34: J31.1 U1.D6 | length 9.3
  L1(Top) w0.102: U1.D6 5.742,6.55 6.14,6.948 v2(6.14,7.04)
  L2 w0.102: v1(0.88,4.8) 0.64,4.8 0.53,4.91 0.53,5.43 0.71,5.61 0.89,5.61 1.05,5.77 1.05,6.65 1.83,7.43 2.33,7.43 2.59,7.69 3.98,7.69 4.138,7.532 5.586,7.532 6.078,7.04 v2(6.14,7.04)
  L4(Bot) w0.102: J31.1 0.61,4.75 0.83,4.75 v1(0.88,4.8)
BOOTLOAD: J7.1 U1.H10 | length 2.6
  L1(Top) w0.069: 7.53,8.35 7.53,9.05 7.53,9.063 ; 7.53,9.083 8.14,9.693
  L1(Top) w0.102: U1.H10 7.53,8.35 ; 8.14,9.693 8.724,9.693 v1(8.815,9.602)
D0: J51.1 U1.G4 | length 7.5
  L4(Bot) w0.102: v1(6.93,5.75) 6.93,5.827 7.215,6.112 8.068,6.112 8.37,5.81 8.37,3.47 8.47,3.37 8.47,3.07 8.25,2.85 7.83,2.85 7.61,2.63 7.61,1.95 7.67,1.89 7.67,0.83 J51.1
D1: J49.1 U1.H4 | length 5.8
  L4(Bot) w0.102: J49.1 6.75,2.15 7.83,3.23 7.83,3.72 7.95,3.84 7.95,4.77 7.33,5.39 v1(7.33,5.75)
D2: J48.1 U1.J4 | length 12.8
  L3 w0.102: v3(6.25,1.67) 5.73,1.67 5.39,1.33 5.01,1.33 3.93,1.33 3.63,1.33 3.39,1.09 2.99,1.09 2.91,1.17 2.91,1.59 3.09,1.77 3.63,1.77 5.06,1.77 6.48,3.19 v3(8.15,3.19)
  L4(Bot) w0.102: v1(7.73,5.75) 8.03,5.75 8.15,5.63 v3(8.15,3.19)
D3: J54.1 U1.G3 | length 7.4
  L3 w0.102: v3(6.51,2.37) 7.77,2.37 7.83,2.43 8.77,2.43 v3(8.95,2.25)
  L4(Bot) w0.102: v3(6.51,2.37) 7.1,2.96 7.1,3.9 7.27,4.07 7.463,4.07 7.691,4.297 7.691,4.739 7.08,5.35 v1(6.93,5.35) ; v3(8.95,2.25) 9.11,2.09 9.11,1.55 J54.1
D7: J13.1 U1.C8 | length 3.4
  L1(Top) w0.069: 5.13,7.627 5.13,9.119
  L1(Top) w0.102: 5.13,7.627 5.13,7.55 U1.C8 ; 5.13,9.119 5.13,9.17 4.95,9.35 4.95,9.63 5.262,9.942 v1(5.485,9.942)
  L4(Bot) w0.254: v1(5.485,9.942) 5.558,9.942 J13.1
D8: J11.1 U1.E10 | length 1.8
  L1(Top) w0.069: 6.33,8.349 6.33,9.058
  L1(Top) w0.102: U1.E10 6.329,8.349 ; 6.33,9.058 6.33,9.11 6.386,9.166 6.386,9.338 v1(6.739,9.691)
D9: J6.1 U1.D9 | length 6.7
  L1(Top) w0.069: 5.93,8.023 5.93,9.049
  L1(Top) w0.102: U1.D9 5.93,7.95 5.93,8.023 ; v2(5.815,9.627) 5.815,9.397 5.93,9.281 5.93,9.049
  L2 w0.102: v2(5.815,9.627) 5.815,9.732 6.117,10.034 9.126,10.034 9.24,9.92 v1(9.24,9.63)
  L4(Bot) w0.2: v1(9.24,9.63) 9.24,8.96 J6.1
D10: J8.1 U1.F10 | length 3.3
  L1(Top) w0.069: 6.73,8.42 6.73,9.06
  L1(Top) w0.102: U1.F10 6.73,8.35 6.73,8.42 ; 6.73,9.06 v2(6.73,9.25)
  L2 w0.102: v2(6.73,9.25) 6.96,9.02 7.987,9.02 v1(8.248,9.281)
  L4(Bot) w0.102: J8.1 8.25,8.91 J8.1@8.27,8.89
  L4(Bot) w0.3: v1(8.248,9.281) 8.25,9.28 J8.1
D14: J20.1 U1.C7 | length 4
  L3 w0.127: v3(2.25,9.11) 2.33,9.11 v3(3.61,7.83)
  L4(Bot) w0.102: v3(3.61,7.83) 4.03,7.83 4.39,7.47 4.82,7.47 5.33,6.96 v1@5.33,6.95
  other v1: 5.27,7.01
D15: J29.1 U1.C6 | length 5.7
  L1(Top) w0.203: v1(5.289,6.602) 5.289,6.591 U1.C6
  L4(Bot) w0.102: J29.1 2.482,5.75 2.67,5.938 2.67,6.53 2.97,6.83 3.33,6.83 3.59,7.09 4.51,7.09 5.023,6.577 5.264,6.577 v1(5.289,6.602)
D17: J43.1 U1.E3 | length 12.2
  L3 w0.102: v3(3.73,0.89) 3.94,1.1 5.46,1.1 5.73,1.37 5.99,1.37 6.05,1.31 6.39,1.31 7.17,2.09 v3(7.97,2.09)
  L4(Bot) w0.102: v1(6.134,5.404) 6.134,5.643 6.545,6.055 6.865,6.055 7.16,6.35 8.19,6.35 8.59,5.95 8.59,3.83 8.75,3.67 8.75,2.99 7.97,2.21 v3(7.97,2.09)
D36: J55.1 U1.G8 | length 10.1
  L1(Top) w0.17: U1.G8 v1(6.93,7.39)
  L4(Bot) w0.102: v1(6.93,7.39) 7.297,7.757 8.406,7.757 8.692,7.47 9.71,7.47 10.03,7.15 10.03,2.77 9.75,2.49 9.75,2.09 J55.1
D38: J56.1 U1.J7 | length 9.6
  L1(Top) w0.102: U1.J7 7.845,6.835 8.678,6.835 8.87,7.026 8.87,7.73 v1(8.817,7.783)
  L4(Bot) w0.102: v1(8.817,7.783) 9.797,7.783 10.25,7.33 10.25,2.59 10.11,2.45 10.11,1.69 J56.1
D40: J5.1 U1.J12 | length 2.6
  L1(Top) w0.102: 7.913,8.986 9.197,8.986 9.572,9.362 9.75,9.54 v1(9.75,9.8)
  L1(Top) w0.18: U1.J12 7.769,8.989 7.91,8.989
  L4(Bot) w0.2: J5.1 v1(9.75,9.8)
D41: J45.1 U1.D7 | length 7.7
  L3 w0.2: v4(3.7,4.05) 3.7,3.14 v4(3.88,2.96)
  L4(Bot) w0.102: v4(3.7,4.05) 3.7,5.01 4.66,5.97 5.126,5.97 5.73,6.574 v1(5.73,6.95) ; v4(3.88,2.96) 4.75,2.09 J45.1
DVDD: C11.1 U1.F1 | length 5.4
  L1(Top) w0.152: U1.F1 6.604,4.476 v2(6.608,4.476)
  L2 w0.127: v2(6.608,4.476) 6.599,4.476 6.579,4.456 6.579,4.081 7.39,3.27 7.67,3.27 9.03,4.63 9.03,5.741 v1(9.338,6.049)
GND: C1.2 C2.2 C3.2 C4.2 C5.2 C6.1 C7.1 C8.2 C11.2 C12.2 C13.2 C14.2 C15.2 C16.2 C17.2 C18.2 J1.1 J22.1 J38.1 J39.1 J47.1 J59.1 U1.B2 U1.C4 U1.D2 U1.F5 U1.G1 U1.H2 U1.J2 U1.J3 | length 9.7
  L1(Top) w0.16: U1.G1 7.009,4.471 v5(7.009,4.346)
  L1(Top) w0.178: U1.H2 U1.J2
  L1(Top) w0.2: v2(1.35,1.95) v2(2.15,1.95) ; C12.2@1.45,1.85 v1(1.45,1.45) 1.588,1.312 ; C3.2 C14.2 C1.2 ; 8.28,4.95 8.32,4.99 ; v2(9.35,5.25) C17.2 9.394,5.25 v2(10.15,5.25) 10.338,5.438 C11.2 10.338,6.938 v2(10.35,6.95) v2(10.35,7.85)
  L1(Top) w0.25: U1.J2 8.28,4.95
  L1(Top) w0.3: v1(1.55,7.77) 1.73,7.95 C1.2 v1(2.15,7.95) ; C3.2 2.05,6.35 v1(2.25,6.15)
  L4(Bot) w0.178: v1(1.466,9.168) 1.466,9.034 1.49,9.01 1.54,9.01
  L4(Bot) w0.254: J47.1 5.75,0.95 v1(5.85,1.05) 5.85,1.127 5.779,1.198 5.779,1.277
  other v1: 0.75,0.75 1.75,0.75 11.75,0.75 0.75,9.75 11.75,9.75
  other v2: 4.05,1.15 10.15,1.25 3.75,1.95 7.05,2.05 11.15,2.15 2.25,4.65 5.73,4.896 4.93,4.95 7.35,4.95 7.73,5.35 5.303,5.816 10.35,6.05 11.65,6.05 6.53,6.15 0.71,6.25 11.65,6.75 11.75,8.95
  other v5: 8.17,6.53
NetA1_FEED: A1.FEED L4.2 | length 1.5
  L1(Top) w0.254: L4.2 13.3,9 A1.FEED
NetC1_1: C1.1 U1.A6 | length 3
  L1(Top) w0.076: 3.319,6.829 3.649,6.5 3.914,6.5 4.004,6.59 4.25,6.59 4.29,6.55 U1.A6@4.53,6.55
  L1(Top) w0.102: C1.1@2.895,7.905 C1.1 ; C1.1@2.911,7.877 2.888,7.899 2.85,7.937 C1.1 ; C1.1@2.915,7.95 C1.1 ; C1.1@2.939,7.861 2.939,7.905 C1.1@2.939,7.95 ; C1.1@2.971,7.893 3.319,7.546 3.319,6.829 ; U1.A6@4.53,6.55 U1.A6@4.537,6.55
  L1(Top) w0.127: C1.1 C1.1@2.939,7.95
NetC2_1: C2.1 L2.2 R2.1 U1.D1 | length 3.4
  L1(Top) w0.127: U1.D1 5.73,4.21 5.91,4.03 5.91,3.27 6.09,3.09 6.25,2.93 L2.2
  L1(Top) w0.254: v2(6.01,3.09) 6.09,3.09 6.25,3.09 L2.2@6.25,2.93
  L1(Top) w0.406: R2.1 C2.1
  other v2: 3.61,2.81 3.89,2.81 6.01,2.81 6.49,2.81 3.61,3.09 3.89,3.09 6.49,3.09
NetC3_1: C3.1 U1.A3 | length 2.6
  L1(Top) w0.102: 3.61,5.146 3.842,5.146 4.051,5.354 U1.A3@4.526,5.354
  L1(Top) w0.127: C3.1@2.95,6.35 C3.1 3.09,6.11 3.137,6.11 3.329,5.917 3.329,5.426 3.61,5.146
NetC4_1: C4.1 R2.2 U1.H1 | length 9.1
  L1(Top) w0.102: R2.2 2.95,1.15 3.402,0.698 6.462,0.698 6.85,1.086 C4.1 6.938,1.238 7.438,1.238 7.502,1.302 7.502,3.638 v1(7.51,3.63)
  L3 w0.203: v1(7.38,4.55) 7.38,3.76 v1(7.51,3.63)
NetC5_1: C5.1 U1.B3 | length 5.7
  L1(Top) w0.069: 4.31,5.15 4.43,5.15 4.64,5.15
  L1(Top) w0.102: v1(4.17,5.01) 4.31,5.15 ; 4.64,5.15 4.654,5.15 4.854,5.35 U1.B3 ; C5.1@5.05,1.265 C5.1 5.29,1.39 5.29,1.461 5.431,1.602 v1(5.431,3.6)
  L3 w0.15: v1(4.17,5.01) 4.17,4.564 5.134,3.6 v1(5.431,3.6)
NetC6_2: C6.2 U1.E1 Y1.3 | length 6.1
  L1(Top) w0.102: U1.E1 6.091,4.511 6.091,4.153 6.274,3.97 6.662,3.97 6.79,3.841 7.289,3.841 7.432,3.984 8.176,3.984 8.66,3.5 8.66,2.537 8.173,2.05 Y1.3
  L1(Top) w0.2: Y1.3 8.095,2.03 8.095,1.204 C6.2
NetC7_2: C7.2 U1.E2 Y1.1 | length 5.4
  L1(Top) w0.069: 6.33,4.29 6.33,4.727
  L1(Top) w0.102: U1.E2 6.13,4.927 6.33,4.727 ; 6.33,4.29 6.45,4.171 6.759,4.171 6.881,4.049 7.22,4.049 7.356,4.184 8.312,4.184 9.425,3.071 Y1.1
  L1(Top) w0.2: Y1.1 C7.2
NetC8_1: C8.1 U1.D3 | length 3.1
  L1(Top) w0.127: v2(6.259,3.669) 6.28,3.69 6.632,3.69 6.84,3.482 6.84,3.26 C8.1
  L2 w0.102: v2(5.735,5.318) 5.762,5.318 6.127,4.953 6.127,3.801 v2(6.259,3.669)
NetC18_1: C18.1 L3.2 L4.1 | length 4.2
  L1(Top) w0.293: L3.2 C18.1 11.15,7.05 11.55,7.45 L4.1
NetL1_1: L1.1 U1.A1 | length 2.6
  L1(Top) w0.2: L1.1 2.51,4.11 L1.1@3.05,4.11 ; 4.09,4.11 U1.A1@4.53,4.55
  L1(Top) w0.356: L1.1@3.05,4.11 4.09,4.11
NetL1_2: L1.2 U1.A2 | length 2.8
  L1(Top) w0.102: 4.17,4.59 U1.A2@4.53,4.95
  L1(Top) w0.127: 3.622,4.59 4.17,4.59
  L1(Top) w0.2: L1.2@2.79,5.251 2.79,5.15 3.063,5.15 3.622,4.59
  L1(Top) w0.356: L1.2 2.591,5.45 L1.2@2.79,5.251
NetL2_1: L2.1 U1.C1 | length 2.3
  L1(Top) w0.127: L2.1 4.65,2.75 4.99,3.09 4.99,3.79 5.33,4.13 U1.C1
R\S\T\: J50.1 U1.G7 | length 11.2
  L1(Top) w0.069: 7.17,7.15 8.05,7.15
  L1(Top) w0.102: U1.G7 7.13,7.15 7.17,7.15 ; 8.05,7.15 8.097,7.197 v1(8.529,7.197)
  L3 w0.152: v3(7.25,1.41) 7.549,1.709 9.379,1.709 9.88,2.21 9.88,3.2 v3(9.69,3.39)
  L4(Bot) w0.102: J50.1 J50.1@7.39,1.69 ; v1(8.529,7.197) 8.585,7.253 9.547,7.253 9.79,7.01 9.79,4.09 9.69,3.99 v3(9.69,3.39)
RFIOP: C17.1 L3.1 U1.J1 | length 2.5
  L1(Top) w0.2: U1.J1 9.094,4.55 C17.1
  L1(Top) w0.293: C17.1@9.394,4.25 L3.1
RXI-0: J3.1 U1.H12 | length 4.4
  L1(Top) w0.102: U1.H12 7.33,9.33 v2(7.45,9.45)
  L2 w0.102: v2(7.45,9.45) 7.598,9.302 7.845,9.302 8.172,9.629 8.338,9.629 8.719,9.249 9.81,9.249 10.061,9.499 10.499,9.499 v1(10.75,9.75)
SWDCK: J2.1 U1.F8 | length 7.3
  L3 w0.152: v1(6.53,7.35) 6.53,7.93 v3(6.73,8.13) ; v3(7.75,9.19) 7.75,8.983 8.003,8.73 9.38,8.73 9.972,9.322 10.878,9.322 v3(11.25,8.95)
  L4(Bot) w0.102: v3(6.73,8.13) 6.89,7.97 7.57,7.97 7.75,8.15 v3(7.75,9.19)
SWDIO: J10.1 U1.F7 | length 3.3
  L3 w0.152: v6(6.53,6.95) 7.47,6.95 7.79,7.27 7.79,7.817 v3(7.255,8.352)
  L4(Bot) w0.102: J10.1 7.27,8.95 7.255,8.935 v3(7.255,8.352)
TXO-0: J9.1 U1.H11 | length 1.9
  L1(Top) w0.069: 7.13,8.788 7.13,9.119 7.13,9.2
  L1(Top) w0.102: 7.13,8.788 7.33,8.588 U1.H11 ; 7.13,9.2 7.13,9.63 7.268,9.768 7.744,9.768 v1(7.774,9.738)
VDD: C12.1 C13.1 C14.1 C15.1 C16.1 J36.1 J37.1 U1.B1 U1.C2 U1.C3 U1.F6 U1.G2 | length 5.1
  L1(Top) w0.102: U1.B1 4.934,4.546 v1(4.934,4.493) 4.952,4.493 5.33,4.872 v1(5.33,4.95)
  L1(Top) w0.127: v1(5.33,4.95) U1.C3
  L1(Top) w0.2: v1(9.35,6.95) C13.1
  L1(Top) w0.254: v1(1.747,2.647) 1.747,2.923 1.774,2.95
  L1(Top) w0.3: C12.1 1.774,2.95 C16.1
  L4(Bot) w0.254: J37.1@0.602,1.753 0.605,1.75 J37.1 0.696,1.804 1.158,2.266 J36.1@1.403,2.266 ; J36.1 1.55,2.253 1.747,2.45 v1(1.747,2.647) ; J36.1@1.625,2.325 J36.1@1.554,2.254 ; J36.1@1.403,2.266 1.415,2.254 J36.1@1.554,2.254 ; J36.1@1.403,2.266 1.534,2.266 1.545,2.255 1.555,2.255 J36.1@1.554,2.254
  other v1: 6.93,4.95 2.85,7.15
  other v4: 0.6,1.75 0.9,1.75 1.4,2.25 1.7,2.25
  other v6: 6.59,6.55
XI: J35.1 U1.B4 | length 8.7
  L1(Top) w0.17: v2(4.872,5.833) 4.872,5.808 U1.B4
  L2 w0.102: v1(0.816,2.509) 0.939,2.509 1.48,3.05 1.48,3.503 1.866,3.89 1.866,6.266 2.13,6.53 2.43,6.53 2.75,6.211 2.75,6.01 3.556,5.204 3.896,5.204 4.526,5.833 v2(4.872,5.833)
  L4(Bot) w0.3: J35.1 0.816,2.684 v1(0.816,2.509)
XO: J34.1 U1.A4 | length 7.8
  L1(Top) w0.076: v2(3.667,5.945) 3.842,5.945 4.037,5.75 U1.A4
  L2 w0.102: v1(0.809,3.26) 0.819,3.25 1.08,3.25 1.23,3.4 1.23,3.683 1.663,4.116 1.663,6.363 2.047,6.747 2.501,6.747 3.318,5.93 3.652,5.93 v2(3.667,5.945)
  L4(Bot) w0.152: v1(0.809,3.26) 0.819,3.25 J34.1
~AD11: J32.1 U1.B5 | length 4.8
  L1(Top) w0.069: 4.329,6.35 4.73,6.35
  L1(Top) w0.102: v1(4.15,6.31) v1@4.19,6.35 ; v1(4.15,6.31) v1@4.19,6.35 ; 4.328,6.35 v1@4.19,6.35 ; 4.73,6.35 U1.B5
  L4(Bot) w0.102: J32.1 2.25,4.25 2.66,4.66 2.66,5.36 3.61,6.31 v1(4.15,6.31)
~AD12: J26.1 U1.A7 | length 6.6
  L1(Top) w0.076: 3.92,7.09 4.04,6.97 U1.A7@4.51,6.97
  L1(Top) w0.102: v1(0.75,7.25) 1.15,7.65 1.15,8.165 1.48,8.495 3.185,8.495 3.39,8.29 3.39,7.89 3.532,7.748 3.532,7.247 3.69,7.09 3.92,7.09 ; U1.A7@4.51,6.97 U1.A7@4.53,6.95
  L4(Bot) w0.102: v1(0.75,7.25) J26.1
~AD13: J28.1 U1.B7 | length 4.4
  L1(Top) w0.069: 4.39,7.15 4.65,7.15
  L1(Top) w0.102: v1(3.83,7.39) 3.92,7.39 4.16,7.15 4.39,7.15 ; 4.65,7.15 4.73,7.15 U1.B7
  L4(Bot) w0.102: J28.1 1.71,6.25 2.43,6.97 2.43,7.43 2.49,7.49 3.73,7.49 v1(3.83,7.39)
~AD29: J33.1 U1.A5 | length 6.6
  L1(Top) w0.076: 3.717,6.314 4.008,6.023 4.403,6.023 U1.A5
  L1(Top) w0.102: v2(3.424,6.314) 3.717,6.314
  L2 w0.102: v1(0.895,3.769) 1.46,4.334 1.46,5.38 1.46,6.45 1.96,6.95 2.585,6.95 2.714,6.821 2.719,6.821 3.15,6.39 3.244,6.296 3.405,6.296 v2(3.424,6.314)
~AD31: J44.1 U1.D5 | length 6
  L1(Top) w0.203: U1.D5@5.787,6.207 v1(5.838,6.207)
  L4(Bot) w0.102: J44.1 3.438,2.362 3.438,3.318 4.53,4.411 4.53,4.899 v1(5.838,6.207)
~AD32: J24.1 U1.B6 | length 4.3
  L1(Top) w0.069: 4.343,6.75 4.648,6.75
  L1(Top) w0.102: v1(3.81,6.79) 4.31,6.79 4.31,6.784 4.343,6.75 ; 4.648,6.75 4.73,6.75 U1.B6
  L3 w0.152: v3(1.55,8.31) 2.65,8.31 3.08,7.88 3.08,7.52 v1(3.81,6.79)
~AD33/SWO: J30.1 U1.C5 | length 7.4
  L1(Top) w0.203: v2@5.407,6.219 5.339,6.15 U1.C5 5.398,6.219 5.409,6.219 v2(5.41,6.217)
  L2 w0.102: v1(0.89,5.25) 0.879,5.25 1.257,5.627 1.257,6.534 1.876,7.153 2.353,7.153 2.67,7.47 3.23,7.47 3.61,7.09 4.15,7.09 4.965,6.275 5.353,6.275 v2(5.41,6.217)
  L4(Bot) w0.102: v1(0.89,5.25) J30.1
~AD35: J14.1 U1.E4 | length 3.6
  L1(Top) w0.102: U1.E4 6.15,5.77 v1(6.15,6.54)
  L1(Top) w0.152: v1@6.13,6.52 v1(6.15,6.54)
  L4(Bot) w0.102: J14.1 5.27,8.93 5.27,8.24 6.15,7.36 v1(6.15,6.54)
~D4: J15.1 U1.A11 | length 1.7
  L1(Top) w0.17: v2(4.41,8.637) 4.497,8.55 U1.A11
  L2 w0.152: v2(4.41,8.637) 4.75,8.977 v1(4.75,9.89)
  L4(Bot) w0.102: J15.1 v1(4.75,9.89)
~D5: J12.1 U1.D8 | length 3.5
  L1(Top) w0.102: U1.D8 6.028,7.35 6.089,7.411 v5(6.089,7.448)
  L2 w0.102: v5(6.089,7.448) 6.089,8.949 6.257,9.117 v6(6.257,9.704)
  L4(Bot) w0.102: J12.1 6.25,9.697 v6(6.257,9.704)
~D6: J23.1 U1.C9 | length 7.3
  L1(Top) w0.069: 5.53,7.95 5.53,9.09
  L1(Top) w0.102: v1(5.29,9.51) 5.53,9.27 5.53,9.09 ; U1.C9 5.53,7.95
  L3 w0.127: v3(0.75,8.75) 0.75,9.27 1.09,9.61 1.67,9.61 1.85,9.43 2.43,9.43 2.53,9.33 5.11,9.33 v1(5.29,9.51)
~D18: J41.1 U1.D4 | length 7.2
  L1(Top) w0.069: 4.211,5.55 5.529,5.55
  L1(Top) w0.102: v1(3.8,5.55) 4.21,5.55 ; 5.529,5.549 U1.D4
  L4(Bot) w0.102: J41.1 2.75,2.55 3.184,2.984 3.184,4.934 v1(3.8,5.55)
~D19: J40.1 U1.F2 | length 8.5
  L3 w0.2: v4(2.85,3.26) 2.85,3.94 3.455,4.545 3.755,4.545 4.81,3.49 v4(4.81,3.26)
  L4(Bot) w0.102: J40.1 2.25,2.66 v4(2.85,3.26)
  L4(Bot) w0.127: v4(4.81,3.26) 5.78,3.26 6.53,4.01 v1(6.53,4.95)
~D22: J17.1 U1.B10 | length 2.4
  L1(Top) w0.069: 4.73,8.375 4.73,9.19
  L1(Top) w0.102: v1@3.753,9.75 4.31,9.75 4.73,9.33 4.73,9.19 ; 4.73,8.375 4.93,8.175 U1.B10
  other v1: 3.75,9.75
~D23: J18.1 U1.A12 | length 2.4
  L1(Top) w0.102: v1(3.28,9.73) 3.6,9.41 4.07,9.41 4.37,9.11
  L1(Top) w0.18: 4.37,9.11 U1.A12
  L4(Bot) w0.102: J18.1 3.28,8.98 v1(3.28,9.73)
~D24: J16.1 U1.B9 | length 1.7
  L1(Top) w0.15: v1(4.85,7.83) U1.B9
  L4(Bot) w0.102: J16.1 4.26,8.94 4.65,8.94 4.85,8.74 v1(4.85,7.83)
~D25: J25.1 U1.A8 | length 5.2
  L1(Top) w0.102: v1(0.75,7.75) 0.75,8.15 1.311,8.711 3.31,8.711 3.696,8.325 3.696,7.965 4.311,7.35 U1.A8
~D26: J27.1 U1.A10 | length 4.6
  L4(Bot) w0.102: J27.1 1.79,6.75 2.17,7.13 2.17,7.51 2.863,8.203 v1(4.491,8.203)
~D27: J19.1 U1.B8 | length 3.9
  L1(Top) w0.069: 4.41,7.55 4.63,7.55
  L1(Top) w0.076: 3.947,8.013 4.41,7.55
  L1(Top) w0.102: v1(2.65,9.67) 2.65,9.21 2.938,8.922 3.422,8.922 3.947,8.398 3.947,8.013 ; 4.63,7.55 4.73,7.55 U1.B8
  L4(Bot) w0.102: v1(2.65,9.67) 2.67,9.65 2.75,9.65 J19.1
~D28: J21.1 U1.A9 | length 4.2
  L1(Top) w0.102: v1(2.15,9.75) 2.39,9.99 2.85,9.99 2.97,9.87 2.97,9.57 3.35,9.19 3.462,9.19 4.151,8.501 4.151,8.128 U1.A9@4.53,7.75
  L4(Bot) w0.203: J21.1 v1(2.15,9.75)
~D37: J57.1 U1.E9 | length 12.6
  L1(Top) w0.069: 6.33,7.95 7.98,7.95
  L1(Top) w0.102: U1.E9 6.33,7.95 ; 7.98,7.95 v1(8.255,8.225)
  L4(Bot) w0.102: v1(8.255,8.225) 8.255,8.309 8.436,8.49 10.175,8.49 11.03,7.635 11.03,2.13 10.75,1.85 J57.1
~D39: J4.1 U1.J11 | length 2.7
  L1(Top) w0.102: U1.J11 7.947,8.767 10.067,8.767 v1(10.25,8.95)
~D42: J53.1 U1.J9 | length 11.6
  L1(Top) w0.076: U1.J9 8.19,7.75 8.31,7.87
  L1(Top) w0.102: 8.31,7.87 8.63,8.19 v1(8.81,8.19)
  L3 w0.152: v3(8.71,0.89) 10.13,0.89 10.67,1.43 v3(10.67,2.29)
  L4(Bot) w0.102: v1(8.81,8.19) 9.85,8.19 10.67,7.37 v3(10.67,2.29)
~D43: J52.1 U1.J8 | length 7.6
  L1(Top) w0.102: U1.J8 7.93,7.55 8.388,7.55 v2(8.42,7.582)
  L2 w0.102: v2(8.42,7.582) 8.173,7.335 8.173,7.118 8.64,6.65 v1(8.64,6.45)
  L4(Bot) w0.102: J52.1 8.39,1.69 8.39,2.21 8.97,2.79 8.97,3.93 8.81,4.09 8.81,6.09 8.64,6.26 v1(8.64,6.45)
~D44: J58.1 U1.J10 | length 10.7
  L1(Top) w0.102: U1.J10 8.14,8.56 10.58,8.56 v1(10.77,8.75)
  L4(Bot) w0.102: v1(10.77,8.75) 10.77,8.53 10.77,8.49 11.25,8.01 J58.1
~D45: J46.1 U1.H8 | length 7.7
  L1(Top) w0.102: U1.H8 U1.H8@7.39,7.41 ; v1(7.39,7.43) U1.H8@7.39,7.41 ; v1@7.4,7.42 U1.H8@7.39,7.41
  L4(Bot) w0.102: J46.1 5.21,1.59 5.21,2.35 4.464,3.096 4.464,3.589 5.74,4.865 5.74,5.587 6.403,6.25 6.75,6.25 7.397,6.897 v1@7.397,7.43